# Altium PCB UPCNSL-ABS-PVC-DEP-1A.PcbDoc
Units mm, origin at the board's own origin, x right, y up, seen from the top; angles counter-clockwise.
Board outline 82 x 98.4 mm, 2 copper layers (Top Layer, Bottom Layer), stack 0.325 mm thick; 58 components, 56 nets, 158 pads, 50 vias.
Unrouted connection lines stored in the file: 9.
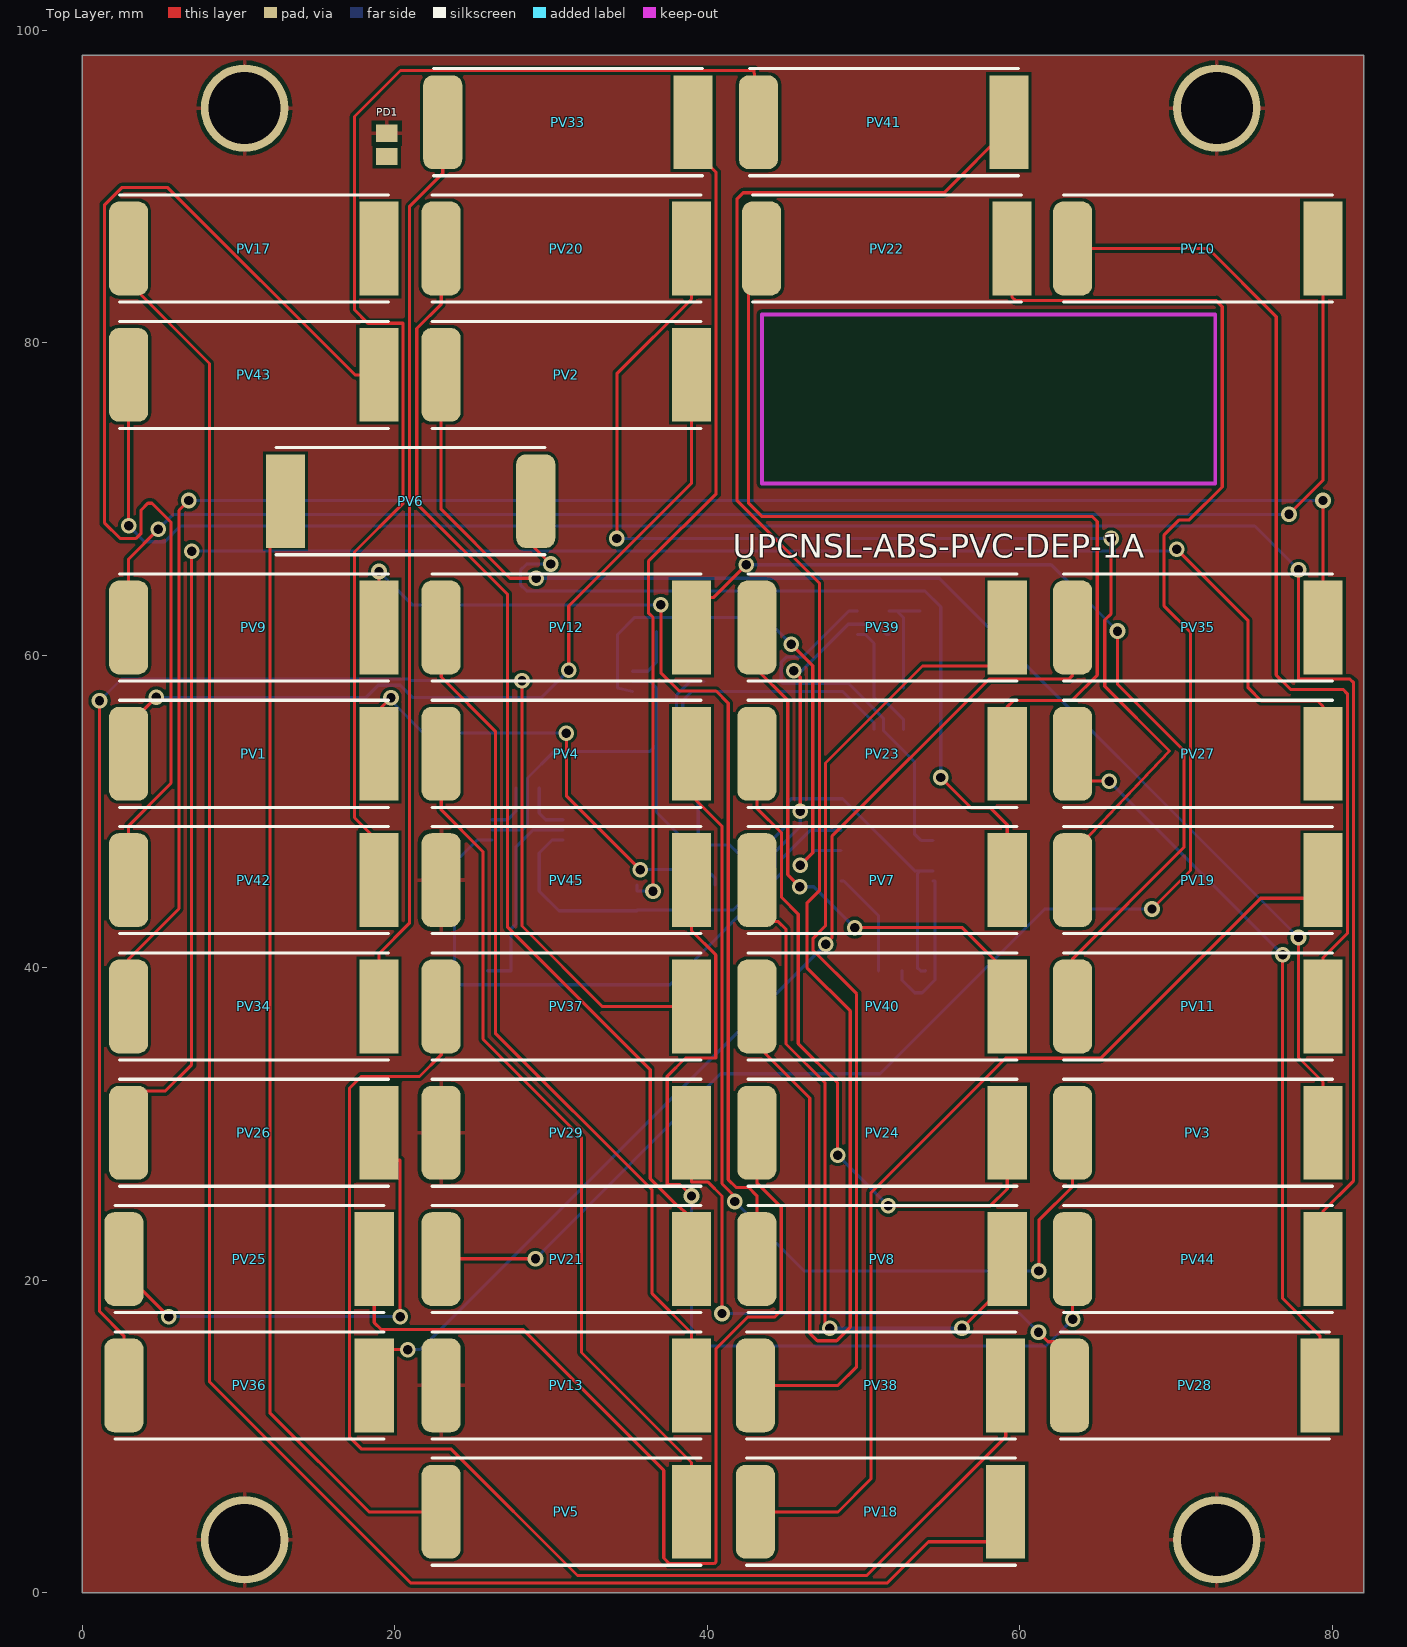
[diagram p0: Top Layer view]
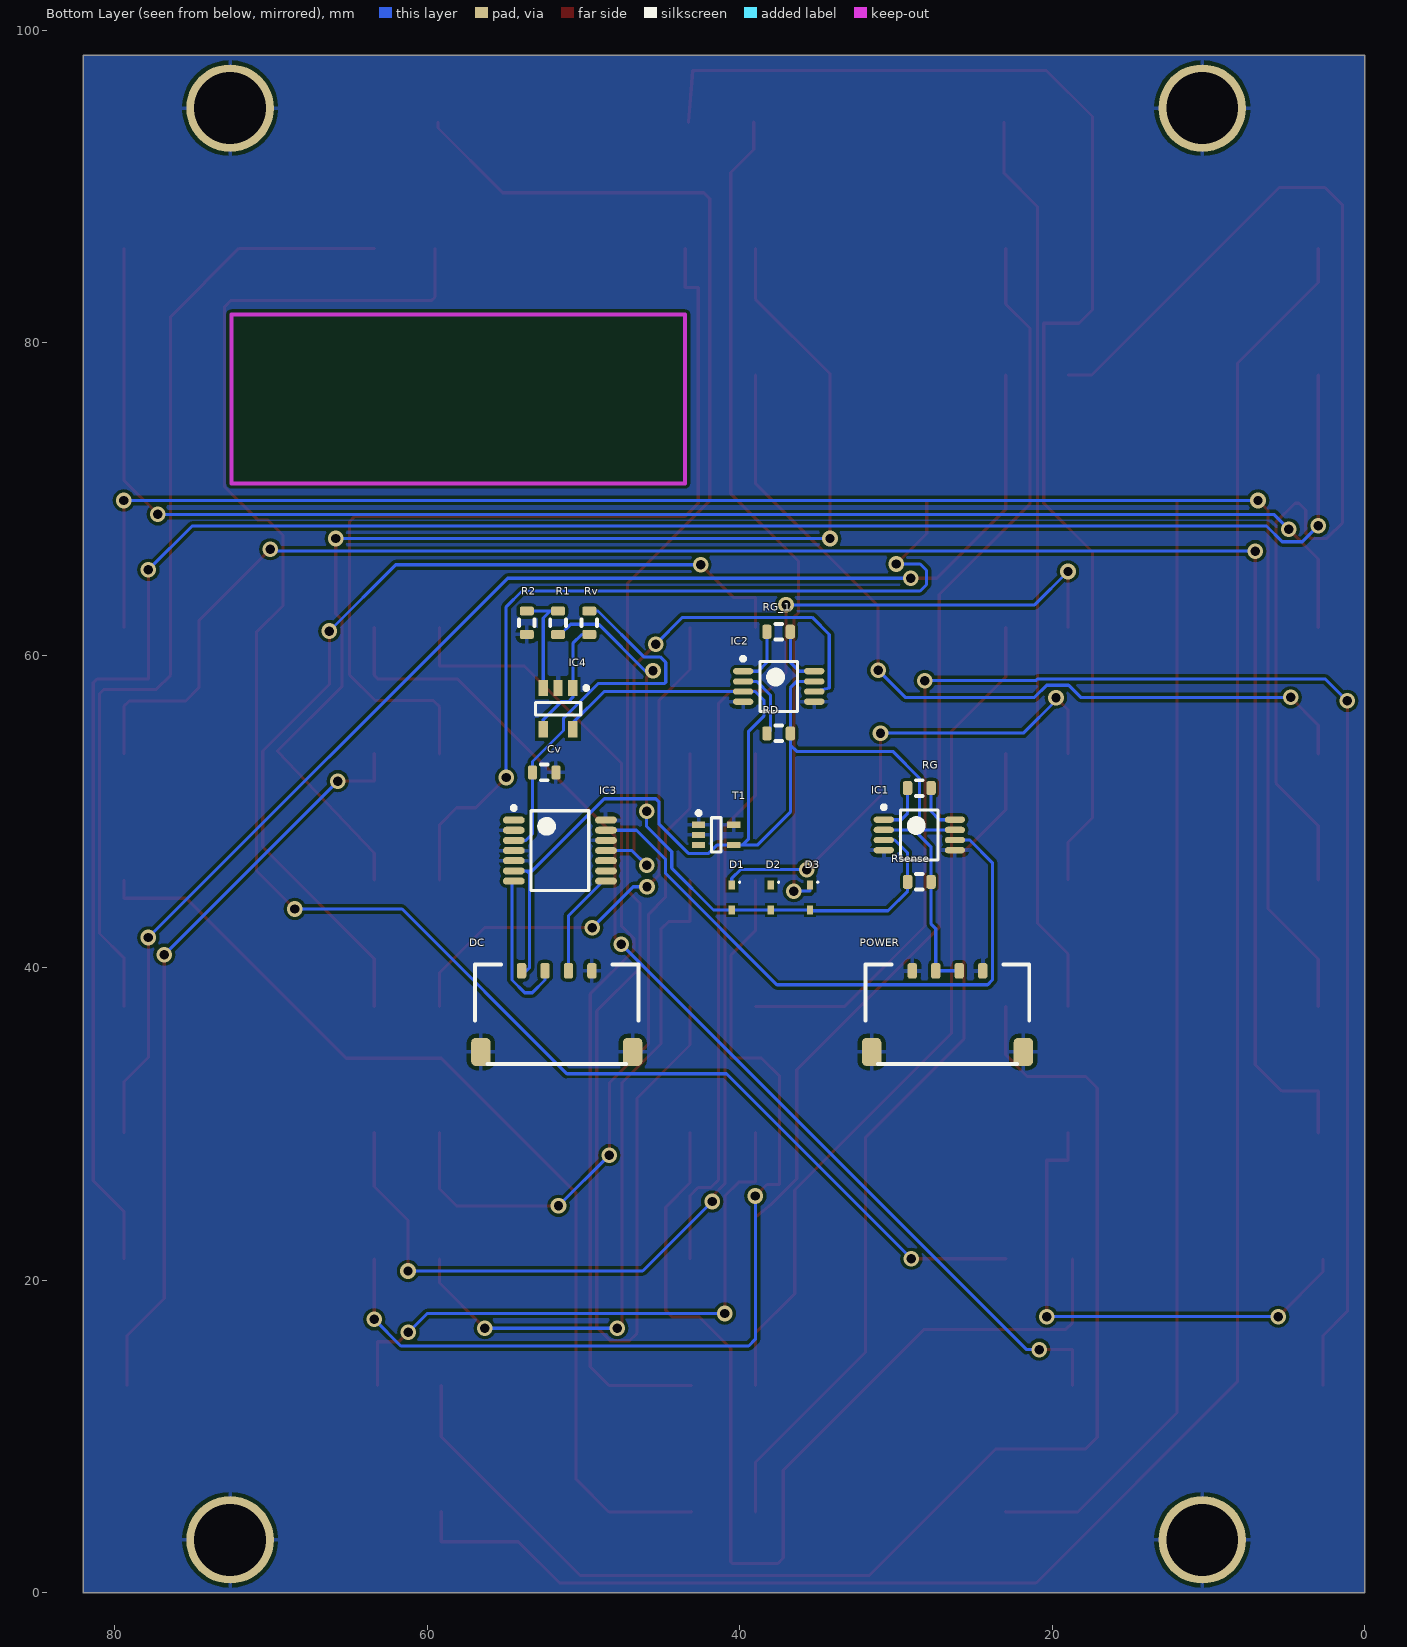
[diagram p1: Bottom Layer view, seen from below]
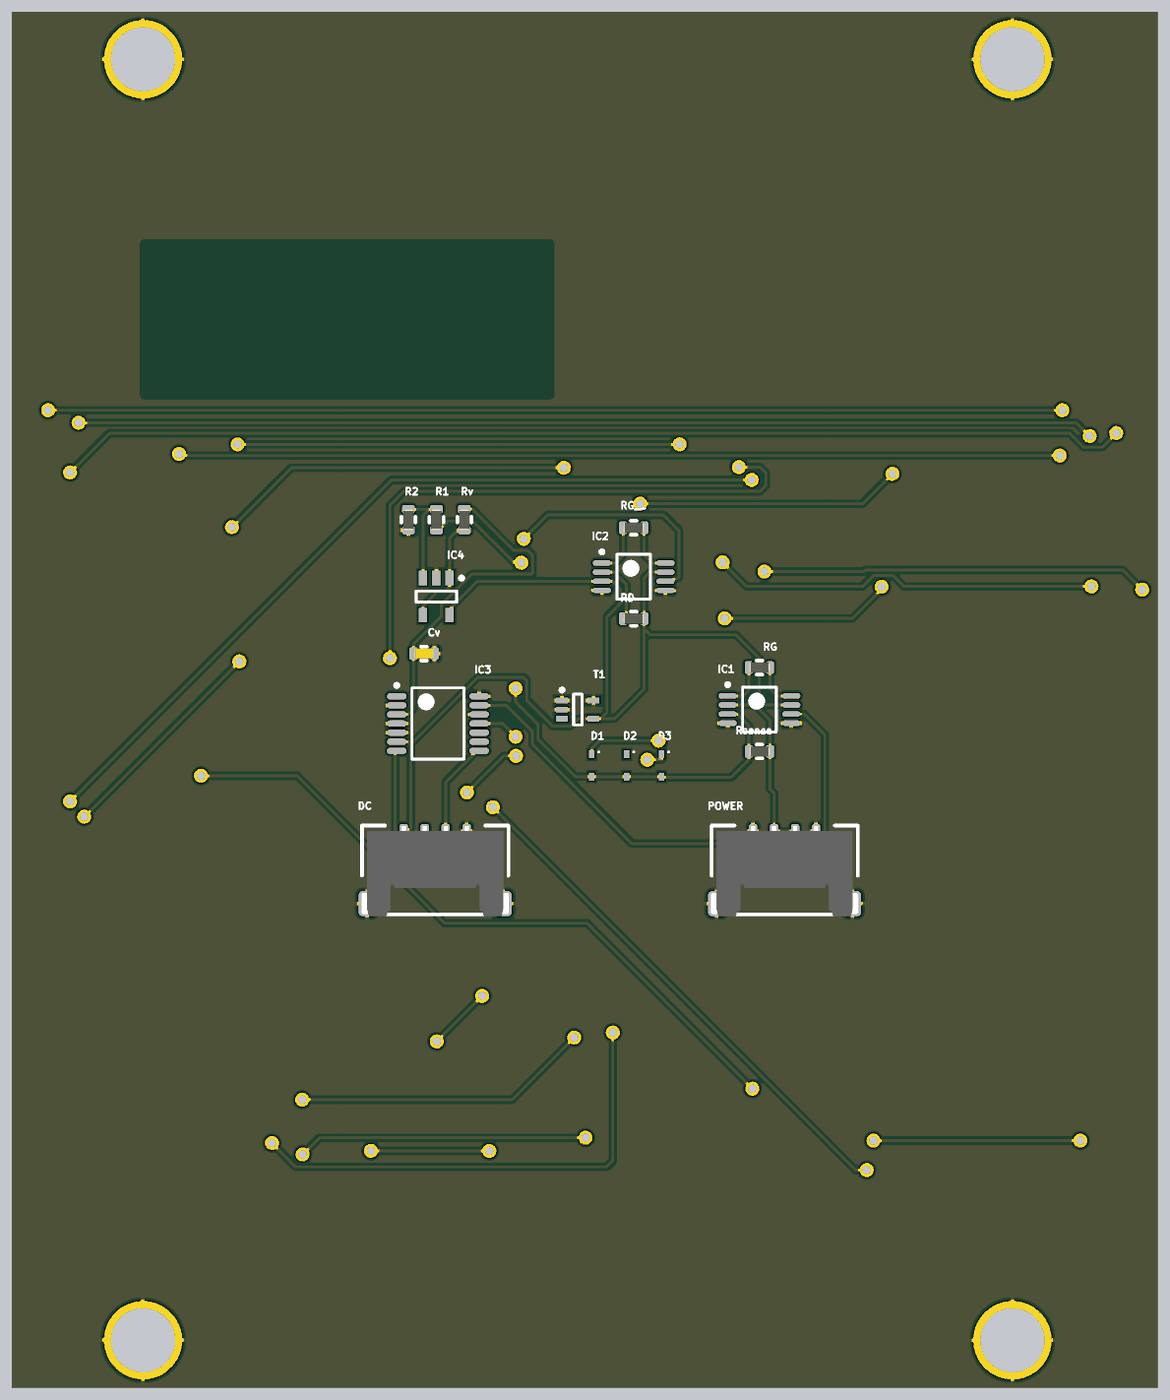
[diagram p2: 3D render of the assembled board from below, using the file's embedded part models]

## Layer stack, top to bottom
Top Solder: solder mask 0.0102, Solder Resist, Dk 3.5
Top Layer: signal copper 0.0356
Dielectric 1: core 0.254, FR-4, Dk 4.2
Bottom Layer: signal copper 0.0356
Bottom Solder: solder mask 0.0102, Solder Resist, Dk 3.5

## Board outline
0,0 82,0 82,98.4 0,98.4

## Design rules (kind name [scope] priority, off if disabled: settings)
Clearance [All] p1: gap=0.2
PolygonConnect [All] p1: connectstyle=Relief reliefconductorwidth=0.256 reliefentries=4 polygonreliefangle="90 Angle" airgapwidth=0.256
RoutingVias [All] p1: holewidth=0.6 width=1 viastyle="Through Hole" minholewidth=0.711 minwidth=1.27 maxholewidth=0.711 maxwidth=1.27
SolderMaskExpansion [All] p1: expansion=0.102
UnpouredPolygon [All] p1: allowunpoured=FALSE
Width [All] p1: maxlimit=1 minlimit=0.2 preferedwidth=0.2
29 further rules are at their usual default settings.

## Components (designator, comment, footprint, x,y, rotation, side; value= is the part's Value field where it differs from the comment)
Cv "CAP0603" CAP0603 52.5,52.5 r0 bottom
D1 "DIODE" "(Schottky diode) SODFL160X70-2N" 40.5,44.5 r270 bottom
D2 "DIODE" "(Schottky diode) SODFL160X70-2N" 38,44.5 r270 bottom
D3 "DIODE" "(Schottky diode) SODFL160X70-2N" 35.5,44.5 r270 bottom
DC "5040500491" 5040500491 51.7,34.619 r180 bottom
IC1 "AD623ARMZ" AD623ARMZ 28.5,48.5 r180 bottom
IC2 "AD623ARMZ" AD623ARMZ 37.5,58 r180 bottom
IC3 "MCP3424" MCP3424 51.5,47.5 r180 bottom
IC4 "AD8603" AD8603 51.616,56.577 r270 bottom
PD1 "Photo Sen" C0805 19.493,92.65 r270 top
POWER "5040500491" 5040500491 26.7,34.619 r180 bottom
PV1 "PVCELL" "PV CELLS" 11,53.691 r180 top
PV2 "PVCELL" "PV CELLS" 31,77.936 r180 top
PV3 "PVCELL" "PV CELLS" 71.4,29.445 r180 top
PV4 "PVCELL" "PV CELLS" 31,53.691 r180 top
PV5 "PVCELL" "PV CELLS" 31,5.2 r180 top
PV6 "PVCELL" "PV CELLS" 21,69.855 r0 top
PV7 "PVCELL" "PV CELLS" 51.2,45.609 r180 top
PV8 "PVCELL" "PV CELLS" 51.2,21.364 r180 top
PV9 "PVCELL" "PV CELLS" 11,61.773 r180 top
PV10 "PVCELL" "PV CELLS" 71.4,86.018 r180 top
PV11 "PVCELL" "PV CELLS" 71.4,37.527 r180 top
PV12 "PVCELL" "PV CELLS" 31,61.773 r180 top
PV13 "PVCELL" "PV CELLS" 31,13.282 r180 top
PV17 "PVCELL" "PV CELLS" 11,86.018 r180 top
PV18 "PVCELL" "PV CELLS" 51.1,5.2 r180 top
PV19 "PVCELL" "PV CELLS" 71.4,45.609 r180 top
PV20 "PVCELL" "PV CELLS" 31,86.018 r180 top
PV21 "PVCELL" "PV CELLS" 31,21.364 r180 top
PV22 "PVCELL" "PV CELLS" 51.5,86.018 r180 top
PV23 "PVCELL" "PV CELLS" 51.2,53.691 r180 top
PV24 "PVCELL" "PV CELLS" 51.2,29.445 r180 top
PV25 "PVCELL" "PV CELLS" 10.7,21.364 r180 top
PV26 "PVCELL" "PV CELLS" 11,29.445 r180 top
PV27 "PVCELL" "PV CELLS" 71.4,53.691 r180 top
PV28 "PVCELL" "PV CELLS" 71.2,13.282 r180 top
PV29 "PVCELL" "PV CELLS" 31,29.445 r180 top
PV33 "PVCELL" "PV CELLS" 31.1,94.1 r180 top
PV34 "PVCELL" "PV CELLS" 11,37.527 r180 top
PV35 "PVCELL" "PV CELLS" 71.4,61.773 r180 top
PV36 "PVCELL" "PV CELLS" 10.7,13.282 r180 top
PV37 "PVCELL" "PV CELLS" 31,37.527 r180 top
PV38 "PVCELL" "PV CELLS" 51.1,13.282 r180 top
PV39 "PVCELL" "PV CELLS" 51.2,61.773 r180 top
PV40 "PVCELL" "PV CELLS" 51.2,37.527 r180 top
PV41 "PVCELL" "PV CELLS" 51.3,94.1 r180 top
PV42 "PVCELL" "PV CELLS" 11,45.609 r180 top
PV43 "PVCELL" "PV CELLS" 11,77.936 r180 top
PV44 "PVCELL" "PV CELLS" 71.4,21.364 r180 top
PV45 "PVCELL" "PV CELLS" 31,45.609 r180 top
R1 "RES0603" RES0603 51.616,62.077 r270 bottom
R2 "RES0603" RES0603 53.616,62.077 r90 bottom
RD "RES0603" RES0603 37.5,55 r180 bottom
RG "RES0603" RES0603 28.5,51.5 r180 bottom
RG_1 "RES0603" RES0603 37.5,61.5 r180 bottom
Rsense "RES0603" RES0603 28.5,45.5 r0 bottom
Rv "RES0603" RES0603 49.616,62.077 r90 bottom
T1 "LMT84 DCK" DCK/SOT65P210X110-5N 41.5,48.5 r180 bottom

## Footprints (in the part's own frame and the unit in brackets; to place one, negate y for a bottom-side part, rotate by r counter-clockwise, add the part's x,y. Pads: shape width x height; smd on the part's side, far side on the other; paste and mask are expansions set on the pad)
5040500491 [mm] "1.50mm Pitch Pico-Lock™ Surface Mount Wire-to-Board Header, Right Angle,2.00mm Mated Height, Positive Side Locks, 4 Circuits"
  rrect50% 1.25x1.8 smd: 0(-4.855,0) 0(4.855,0)
  rrect50% 0.6x1 smd: 1(-2.25,5.19) 2(-0.75,5.19) 3(0.75,5.19) 4(2.25,5.19)
  silkscreen extent -5.23,-0.76 5.23,5.59, body extent -5.27,-0.9 5.28,5.54, height 1.98
"(Schottky diode) SODFL160X70-2N" [mm] "SODFL, 2-Leads, Body 0,80x1,60mm, IPC Medium Density"
  rect 0.55x0.4 smd: A(-0.8,0) K(0.8,0)
  silkscreen extent -1.02,0.45 -0.93,0.55, body extent -0.65,-0.45 0.65,0.45, height 0.7
AD623ARMZ [mm] "Single-Supply, Rail-to-Rail, Instrumentation Amplifier"
  oval 1.3x0.4 smd: 1(-2.275,0.975) 2(-2.275,0.325) 3(-2.275,-0.325) 4(-2.275,-0.975) 5(2.275,-0.975) 6(2.275,-0.325) 7(2.275,0.325) 8(2.275,0.975)
  silkscreen extent -2.4,-1.6 1.2,1.9, body extent -1.6,-1.6 1.6,1.6, height 1.1
AD8603 [mm] "SOT23, 5-Leads, Body 2,90x2,80mm, Pitch 0,95mm, IPC Medium Density"
  rect 1.05x0.6 smd: 1(-1.325,0.95) 2(-1.325,0) 3(-1.325,-0.95) 4(1.325,-0.95) 5(1.325,0.95)
  silkscreen extent -1.45,-1.45 0.4,1.92, body extent -0.8,-1.45 0.8,1.45, height 1
C0805 [mm] "Chip Capacitor, Body 2.0x1.3mm, IPC High Density"
  rect 1.1x1.4 smd: 1(-0.75,0) 2(0.75,0)
  body extent -1.1,-0.72 1.1,0.72, height 1.4
CAP0603 [mm] "Capacitor Chip Inductor, Body 0.6x0.3mm, IPC High Density"
  rrect50% 0.6x0.9 smd: 1(-0.75,0) 2(0.75,0)
  silkscreen extent -0.2,-0.5 0.2,0.5, body extent -0.76,-0.38 0.76,0.38, height 0.76
DCK/SOT65P210X110-5N [mm] "SOT23, 5-Leads, Body 2,00x2,10mm, Pitch 0,65mm, IPC Medium Density"
  rect 0.85x0.4 smd: 1(-1.125,0.65) 2(-1.125,0) 3(-1.125,-0.65) 4(1.125,-0.65) 5(1.125,0.65)
  silkscreen extent -1.25,-1.1 0.3,1.52, body extent -0.7,-1.07 0.7,1.08, height 1.1
MCP3424 [mm] "18-Bit, Multi-Channel ?S Analog-to-Digital Converter with  I2C"
  oval 1.4x0.45 smd: 1(-2.95,1.95) 2(-2.95,1.3) 3(-2.95,0.65) 4(-2.95,0) 5(-2.95,-0.65) 6(-2.95,-1.3) 7(-2.95,-1.95) 8(2.95,-1.95) 9(2.95,-1.3) 10(2.95,-0.65) 11(2.95,0) 12(2.95,0.65) 13(2.95,1.3) 14(2.95,1.95)
  silkscreen extent -3.08,-2.55 1.85,2.85, body extent -2.25,-2.55 2.25,2.55, height 1.2
"PV CELLS" [mm] "IXYS KXOB22-12X1L-ND"
  rect 2.5x6 smd: 1(-7.993,0)
  rrect50% 2.5x6 smd: 2(8.025,0)
  silkscreen extent -8.6,-3.42 8.6,3.43, body extent -8.97,-3.5 9.03,3.5, height 1.8
RES0603 [mm] "Resistor Chip Inductor, Body 0.6x0.3mm, IPC High Density"
  rrect50% 0.6x0.9 smd: 1(-0.75,0) 2(0.75,0)
  silkscreen extent -0.2,-0.5 0.2,0.5, body extent -0.76,-0.38 0.76,0.38, height 0.76

## Part data
Cv: "Capacitor"
DC POWER: library part MOLEX_5040500491, "1.50mm Pitch Pico-Lock™ Surface Mount Wire-to-Board Header, Right Angle,2.00mm Mated Height, Positive Side Locks, 4 Circuits"
IC3: "18-Bit, Multi-Channel ?S Analog-to-Digital Converter with  I2C"
PD1: "Photosensitive Diode"
PV1 PV2 PV3 PV4 PV5 PV6 PV7 PV8 PV9 PV10 PV11 PV12 PV13 PV17 PV18 PV19 PV20 PV21 PV22 PV23 PV24 PV25 PV26 PV27 PV28 PV29 PV33 PV34 PV35 PV36 PV37 PV38 PV39 PV40 PV41 PV42 PV43 PV44 PV45: library part PVCELLS, "IXYS KXOB22-12X1L-ND"
R1 R2 RD RG RG_1 Rsense Rv: "Resistor"

## Free pads (board coordinates)
  round 5.6 hole 4.6: 0(10.4,95) 1(72.6,95) 2(72.6,3.4) 3(10.4,3.4)

## Via types
v1: diameter 1, hole 0.6, Top Layer to Bottom Layer, 50 vias

## Nets (pads, with @x,y where several pads share a name; then routed paths per layer and width w, separated by ;. In a path a pad name is that pad's centre, name@x,y a point inside that pad or via, vN(x,y) a via of type N, cw(c..) or ccw(c..) an arc to the next point about the centre after c; other vN are vias at no path point)
5V: DC.1 IC1.7 IC2.3 IC2.7 IC3.6 IC4.5 RD.2 T1.4 | length 77.6
  Bottom Layer w0.2: IC1.7 28.175,48.825 28.499,49.149 28.499,52.146 30.201,53.848 36.344,53.848 36.75,54.254 ; IC2.7 36.337,58.325 36.75,57.912 RD.2 36.75,54.254 ; IC4.5 50.666,55.677 48.668,57.675 IC2.3 39.006,57.675 38.43,57.099 38.43,56.134 39.421,55.143 39.421,48.256 39.827,47.85 ; DC.1 53.95,39.802 53.645,39.802 53.442,40.005 53.442,45.997 53.645,46.2 ; IC3.6 53.645,46.2 ; 36.75,54.254 36.75,49.962 38.862,47.85 39.827,47.85 ; 39.827,47.85 T1.4 41.453,47.85 41.983,47.32 43.282,47.32 45.149,49.187 45.149,50.597 45.364,50.813 48.654,50.813 53.266,46.2 53.645,46.2
GND: Cv.1 DC.0 DC.4 IC1.4 IC1.5 IC2.4 IC2.5 IC3.2 IC3.4 IC3.5 IC3.12 IC3.14 IC4.2 pad.0 pad.1 pad.2 pad.3 PD1.1 POWER.0 POWER.1 POWER.4 PV13.2 PV29.2 PV45.2 R2.1 T1.1 T1.2 T1.5
IRR: IC2.6 IC3.11 | length 34.7
  Top Layer w0.2: v1(45.364,60.706) 46.749,59.322 46.749,47.355 v1(45.949,46.555)
  Bottom Layer w0.2: IC2.6 34.265,57.912 34.265,61.328 35.357,62.421 43.65,62.421 v1(45.364,60.706) ; v1(45.949,46.555) 46.894,47.5 IC3.11
ISENSE: IC1.6 IC3.13 | length 40
  Bottom Layer w0.2: IC1.6 25.273,48.175 23.825,46.727 23.825,39.218 24.13,38.913 37.617,38.913 44.742,46.038 44.742,46.948 46.594,48.8 IC3.13
NetIC1_1: IC1.1 RG.1 | length 3.3
  Bottom Layer w0.2: RG.1 29.25,49.892 29.667,49.475 IC1.1
NetIC1_8: IC1.8 RG.2 | length 3.2
  Bottom Layer w0.2: IC1.8 27.229,49.475 27.75,49.996 RG.2
NetIC2_1: IC2.1 RG_1.1 | length 3.7
  Bottom Layer w0.2: RG_1.1 38.25,59.538 38.813,58.975 IC2.1
NetIC2_2: IC2.2 PD1.2 RD.1 | length 4.8
  Bottom Layer w0.2: RD.1 38.25,55.143 38.024,55.143 38.024,57.436 38.913,58.325 IC2.2
NetIC2_8: IC2.8 RG_1.2 | length 3.7
  Bottom Layer w0.2: IC2.8 36.187,58.975 36.75,59.538 RG_1.2
NetPV1_2: PV1.2 PV2.1 | length 54.3
  Top Layer w0.2: PV1.2 2.975,55.528 v1(4.75,57.302) ; v1(31.14,59.03) 31.14,63.144 38.993,70.997 PV2.1
  Bottom Layer w0.2: v1(4.75,57.302) 18.174,57.302 18.949,58.077 20.358,58.077 21.133,57.302 29.413,57.302 v1(31.14,59.03)
NetPV2_2: PV2.2 PV3.1 | length 87.9
  Top Layer w0.2: PV2.2 22.975,69.328 27.381,64.922 v1(29.058,64.922) ; v1(77.826,41.935) 77.826,34.257 79.393,32.69 PV3.1
  Bottom Layer w0.2: v1(29.058,64.922) 54.839,64.922 v1(77.826,41.935)
NetPV3_2: PV3.2 PV4.1 | length 60.8
  Top Layer w0.2: PV4.1 38.993,51.003 40.943,49.053 40.943,26.189 41.732,25.4 41.732,25.07 v1(41.758,25.044) ; v1(61.214,20.599) 61.214,23.848 63.375,26.01 PV3.2
  Bottom Layer w0.2: v1(41.758,25.044) 46.203,20.599 v1(61.214,20.599)
NetPV4_2: PV4.2 PV5.1 | length 55.1
  Top Layer w0.2: PV4.2 22.975,50.101 25.654,47.422 25.654,35.433 31.952,29.135 31.952,15.388 38.993,8.347 PV5.1
NetPV5_2: PV5.2 PV6.1 | length 71.9
  Top Layer w0.2: PV6.1@12.007,69.855 12.007,68.097 12.014,68.09 12.014,11.532 18.364,5.182 22.975,5.182 PV5.2
NetPV6_2: PV6.2 PV7.1 | length 55.3
  Top Layer w0.2: PV6.2@28.025,69.855 28.025,67.787 v1(29.975,65.837) ; v1(54.94,52.172) 56.871,50.241 58.115,50.241 59.193,49.163 PV7.1
  Bottom Layer w0.2: v1(29.975,65.837) 28.448,65.837 28.042,65.43 28.042,64.516 28.448,64.11 53.924,64.11 54.94,63.094 v1(54.94,52.172)
NetPV7_2: PV7.2 PV8.1 | length 45.5
  Top Layer w0.2: PV7.2 43.175,42.951 44.552,42.951 45.034,42.469 45.034,35.128 47.536,32.626 47.536,17.234 v1(47.828,16.942) ; v1(56.298,16.942) 59.193,19.837 PV8.1
  Bottom Layer w0.2: v1(47.828,16.942) v1(56.298,16.942)
NetPV9_2: PV9.2 PV10.1 | length 97.7
  Top Layer w0.2: PV9.2 2.975,66.158 v1(4.877,68.059) ; v1(77.216,69.012) 79.393,71.189 PV10.1
  Bottom Layer w0.2: v1(4.877,68.059) 5.829,69.012 v1(77.216,69.012)
NetPV10_2: PV10.2 PV11.1 | length 63.5
  Top Layer w0.2: PV10.2 63.375,86.03 72.034,86.03 76.403,81.661 76.403,58.725 77.318,57.81 80.67,57.81 80.95,57.531 80.95,42.197 79.393,40.64 PV11.1
NetPV11_2: PV11.2 PV12.1 | length 60.5
  Top Layer w0.2: PV12.1 38.993,63.703 40.411,63.703 v1(42.494,65.786) ; PV11.2 63.375,40.589 70.51,47.724 70.51,53.873 66.243,58.141 v1(66.243,61.544)
  Bottom Layer w0.2: v1(42.494,65.786) 62.001,65.786 v1(66.243,61.544)
NetPV12_2: PV12.2 PV13.1 | length 55.1
  Top Layer w0.2: PV12.2 22.975,58.61 26.441,55.143 26.441,35.814 36.474,25.781 36.474,19.156 38.993,16.637 PV13.1
NetPV17_2: PV17.2 PV18.1 | length 133.9
  Top Layer w0.2: PV17.2 2.975,83.842 8.153,78.664 8.153,13.513 21.031,0.635 51.511,0.635 54.153,3.277 59.093,3.277 PV18.1
NetPV18_2: PV18.2 PV19.1 | length 64.5
  Top Layer w0.2: PV18.2 43.075,5.182 48.362,5.182 50.478,7.298 50.478,25.612 59.08,34.214 65.176,34.214 75.413,44.45 79.393,44.45 PV19.1
NetPV19_2: PV19.2 PV20.1 | length 78.4
  Top Layer w0.2: v1(34.214,67.462) 34.214,78.003 38.993,82.783 PV20.1 ; PV19.2 63.375,47.346 69.571,53.873 65.43,58.014 65.43,62.255 65.837,62.662 v1(65.837,67.462)
  Bottom Layer w0.2: v1(34.214,67.462) v1(65.837,67.462)
NetPV20_2: PV20.2 PV21.1 | length 72.6
  Top Layer w0.2: PV20.2 22.975,82.462 21.412,80.899 21.412,69.698 27.229,63.881 27.229,42.596 36.347,33.477 36.347,26.51 37.947,24.911 38.993,24.054 PV21.1
NetPV21_2: PV21.2 PV22.1 | length 113.8
  Top Layer w0.2: PV21.2 22.975,21.387 v1(29.007,21.387) ; PV22.1 59.493,82.906 59.696,82.702 72.542,82.702 72.949,82.296 72.949,70.764 70.841,68.656 70.206,68.656 69.215,67.666 69.215,63.17 70.917,61.468 70.917,46.228 v1(68.453,43.764)
  Bottom Layer w0.2: v1(29.007,21.387) 40.843,33.223 51.054,33.223 61.595,43.764 v1(68.453,43.764)
NetPV22_2: PV22.2 PV23.1 | length 59.3
  Top Layer w0.2: PV22.2 43.475,83.515 42.647,83.515 42.647,69.723 43.485,68.885 64.618,68.885 64.948,68.555 64.948,58.725 63.322,57.099 59.6,57.099 59.193,56.693 PV23.1
NetPV23_2: PV23.2 PV24.1 | length 44.1
  Top Layer w0.2: PV23.2 43.175,50.216 44.749,48.642 44.749,44.507 45.822,43.434 45.822,35.147 48.336,32.633 v1(48.336,28.016) ; v1(51.587,24.765) 58.115,24.765 59.193,25.843 PV24.1
  Bottom Layer w0.2: v1(48.336,28.016) v1(51.587,24.765)
NetPV25_2: PV25.2 PV26.1 | length 32.8
  Top Layer w0.2: PV25.2 2.675,20.549 v1(5.545,17.678) ; PV26.1 18.993,27.686 20.345,27.686 v1(20.345,17.678)
  Bottom Layer w0.2: v1(5.545,17.678) v1(20.345,17.678)
NetPV26_2: PV26.2 PV27.1 | length 122.4
  Top Layer w0.2: PV26.2 2.975,32.106 5.309,32.106 7.01,33.807 v1(7.01,66.66) ; v1(70.028,66.777) 74.6,62.205 74.6,57.912 75.438,57.074 79.045,57.074 79.393,56.725 PV27.1
  Bottom Layer w0.2: v1(7.01,66.66) 69.912,66.66 v1(70.028,66.777)
NetPV27_2: PV27.2 PV28.1 | length 48.3
  Top Layer w0.2: PV27.2 63.375,51.943 v1(65.71,51.943) ; v1(76.81,40.843) 76.81,18.843 79.193,16.459 PV28.1
  Bottom Layer w0.2: v1(65.71,51.943) v1(76.81,40.843)
NetPV28_2: PV28.2 PV29.1 | length 38.8
  Top Layer w0.2: PV29.1 38.993,26.289 40.056,26.289 40.945,25.4 v1(40.945,17.882) ; v1(61.189,16.688) 61.798,16.078 63.175,16.078 PV28.2
  Bottom Layer w0.2: v1(40.945,17.882) 59.995,17.882 v1(61.189,16.688)
NetPV33_2: PV33.2 PV34.1 | length 58.3
  Top Layer w0.2: PV34.1 18.993,40.894 20.943,42.844 20.943,88.698 23.075,90.83 PV33.2
NetPV34_2: PV34.2 PV35.1 | length 114.7
  Top Layer w0.2: PV34.2 2.975,40.56 6.198,43.783 6.198,69.266 v1(6.833,69.901) ; PV35.1 v1(79.393,69.901)
  Bottom Layer w0.2: v1(6.833,69.901) v1(79.393,69.901)
NetPV35_2: PV35.2 PV36.1 | length 71.7
  Top Layer w0.2: PV36.1 18.693,15.57 v1(20.828,15.57) ; v1(47.574,41.515) 47.968,41.908 47.968,48.411 58.028,58.471 63.121,58.471 63.375,58.725 PV35.2
  Bottom Layer w0.2: v1(20.828,15.57) 21.63,15.57 v1(47.574,41.515)
NetPV36_2: PV36.2 PV37.1 | length 100.8
  Top Layer w0.2: v1(1.118,57.074) 1.118,18.017 2.675,16.459 PV36.2 ; v1(28.143,58.369) 28.143,42.672 33.299,37.516 38.993,37.516 PV37.1
  Bottom Layer w0.2: v1(1.118,57.074) 2.521,58.477 20.949,58.477 21.056,58.369 v1(28.143,58.369)
NetPV37_2: PV37.2 PV38.1 | length 84.8
  Top Layer w0.2: PV37.2 22.975,34.431 21.59,33.045 17.856,33.045 17.12,32.309 17.12,9.957 17.856,9.22 23.597,9.22 31.699,1.118 50.203,1.118 59.093,10.008 PV38.1
NetPV38_2: PV38.2 PV39.1 | length 63.7
  Top Layer w0.2: PV38.2 43.075,13.284 48.362,13.284 49.555,14.478 49.555,38.329 46.774,41.11 46.774,41.897 47.568,42.691 47.568,53.105 53.772,59.309 59.193,59.309 PV39.1
NetPV39_2: PV39.2 PV40.1 | length 35.4
  Top Layer w0.2: PV39.2 43.175,59.085 45.149,57.112 45.149,45.961 v1(45.923,45.187) ; v1(49.428,42.57) 56.323,42.57 59.193,39.7 PV40.1
  Bottom Layer w0.2: v1(45.923,45.187) 46.812,45.187 v1(49.428,42.57)
NetPV41_2: PV41.2 PV42.1 | length 83.5
  Top Layer w0.2: PV42.1 18.993,48.037 17.424,49.606 17.424,66.599 20.543,69.717 20.543,81.236 18.288,81.236 17.424,82.1 17.424,94.463 20.371,97.409 42.996,97.409 PV41.2
NetPV42_2: PV42.2 PV43.1 | length 74.3
  Top Layer w0.2: PV42.2 2.975,49.098 5.69,51.813 5.69,68.504 4.47,69.723 4.207,69.723 3.775,69.291 3.775,67.796 3.454,67.475 2.426,67.475 1.422,68.478 1.422,88.798 2.54,89.916 5.486,89.916 17.475,77.927 18.993,77.927 PV43.1
NetPV43_2: PV43.2 PV44.1 | length 134.8
  Top Layer w0.2: v1(2.975,68.275) PV43.2 ; v1(77.826,65.456) 77.826,58.471 81.126,58.471 81.356,58.24 81.356,26.383 79.393,24.42 PV44.1
  Bottom Layer w0.2: v1(2.975,68.275) 3.991,67.259 5.283,67.259 6.286,68.262 75.019,68.262 v1(77.826,65.456)
NetPV44_2: PV44.2 PV45.1 | length 62.7
  Top Layer w0.2: v1(38.989,25.4) 38.252,26.137 37.44,26.137 37.44,33.059 38.608,34.227 40.543,34.227 40.543,40.827 38.993,42.377 PV45.1 ; v1(63.375,17.503) PV44.2
  Bottom Layer w0.2: v1(38.989,25.4) 38.989,16.231 39.421,15.799 61.671,15.799 v1(63.375,17.503)
PV9: PV8.2 PV9.1 | length 68.8
  Top Layer w0.2: PV9.1 v1(18.993,65.354) ; v1(37.033,63.221) 37.033,58.877 38.202,57.709 40.564,57.709 41.343,56.929 41.343,26.445 41.834,25.954 42.635,25.954 43.175,25.414 PV8.2
  Bottom Layer w0.2: v1(18.993,65.354) 21.127,63.221 v1(37.033,63.221)
PV25: PV24.2 PV25.1 | length 66.5
  Top Layer w0.2: PV25.1 18.693,17.299 19.126,16.866 28.194,16.866 37.211,7.849 37.211,2.235 37.567,1.88 40.437,1.88 40.564,2.007 40.564,15.646 42.57,17.653 44.298,17.653 44.729,18.085 44.729,24.684 43.175,26.238 PV24.2
PV41: PV40.2 PV41.1 | length 120.9
  Top Layer w0.2: PV40.2 43.175,35.057 46.558,31.674 46.558,16.624 47.041,16.142 48.273,16.142 49.143,17.012 49.143,37.242 46.374,40.011 46.374,44.139 47.168,44.933 47.168,64.618 41.91,69.875 41.91,89.205 42.291,89.586 55.153,89.586 59.293,93.726 PV41.1
SCL: DC.3 IC3.8 | length 6.8
  Bottom Layer w0.2: IC3.8 48.727,45.55 50.95,43.327 DC.3
SDA: DC.2 IC3.7 | length 9.8
  Bottom Layer w0.2: DC.2 52.45,39.218 53.263,38.405 53.746,38.405 54.559,39.218 54.559,45.55 IC3.7
TEMP: IC3.1
VCC: D1.K D2.K D3.K IC1.3 R1.2 Rsense.2 | length 42.1
  Top Layer w0.2: v1(45.542,59.004) 45.949,58.598 v1(45.949,50.013)
  Bottom Layer w0.2: IC1.3 30.079,48.175 29.25,47.346 Rsense.2 29.25,44.907 30.508,43.649 35.5,43.649 D3.K 36.728,43.7 D2.K 39.243,43.7 D1.K 41.668,43.7 44.342,46.374 44.342,47.429 45.949,49.036 v1(45.949,50.013) ; v1(45.542,59.004) 46.05,59.004 49.022,61.976 50.811,61.976 51.46,61.327 R1.2
VCC_1: D1.A PV1.1 | length 32.3
  Top Layer w0.2: PV1.1 18.993,56.509 v1(19.761,57.277) ; v1(30.988,55.016) 30.988,51.003 v1(35.712,46.279)
  Bottom Layer w0.2: v1(19.761,57.277) 19.761,57.099 21.844,55.016 v1(30.988,55.016) ; v1(35.712,46.279) 39.941,46.279 40.5,45.72 D1.A
VCC_2: D2.A PV17.1
VCC_3: D3.A PV33.1 | length 53.1
  Top Layer w0.2: v1(36.525,44.907) 36.525,62.421 36.233,62.713 36.233,66.002 40.564,70.333 40.564,90.881 39.093,92.352 PV33.1
  Bottom Layer w0.2: D3.A 35.5,44.907 v1(36.525,44.907)
VD: IC4.1 IC4.4 Rv.1 | length 7.9
  Bottom Layer w0.2: Rv.1 50.096,61.327 50.666,60.757 IC4.1 50.666,57.302 50.938,57.03 51.415,57.03 52.566,55.88 IC4.4
VDD: IC1.2 POWER.2 POWER.3 Rsense.1 | length 13
  Bottom Layer w0.2: POWER.3 POWER.2 27.45,42.494 27.75,42.794 Rsense.1 27.75,47.721 28.854,48.825 IC1.2
VDIV: IC4.3 R1.1 R2.2 | length 7.1
  Bottom Layer w0.2: R1.1 52.121,62.827 ; IC4.3 52.566,62.382 52.121,62.827 ; R2.2 52.121,62.827
VOLT: Cv.2 IC3.3 Rv.2 | length 24.6
  Bottom Layer w0.2: Rv.2 49.06,62.827 46.126,59.893 45.085,59.893 44.729,59.538 44.729,58.262 44.8,58.191 49.047,58.191 51.266,55.973 51.266,55.186 53.25,53.201 Cv.2 53.25,48.565 53.665,48.15 IC3.3
pads on no net: IC3.9 IC3.10 T1.3

## Polygon pours and split planes (outlines as drawn)
GND on Top Layer "Top" (solid, pour order 4): 0,0 82,0 82,98.4 0,98.4
GND on Bottom Layer "Bot" (solid, pour order 6): 0,0 82,0 82,98.4 0,98.4

## Keep-outs
Keep-Out Layer:
  lines w0.254: 43.5,71 43.5,81.8 72.5,81.8 72.5,81.7 72.5,71 43.5,71

## Other copper
Top Layer:
  pour cut-out: 43.833,81.467 72.167,81.467 72.167,71.333 43.833,71.333
Bottom Layer:
  pour cut-out: 43.833,81.467 72.167,81.467 72.167,71.333 43.833,71.333

## Silkscreen, mask and mechanical layers (free items; w line width, h text height)
Top Overlay:
  text "UPCNSL-ABS-PVC-DEP-1A" at 41.625,66.23 h1.52
Mechanical 3:
  lines w0.254: 44,71.4 44,81.4 72,81.4 72,71.4 44,71.4
  lines w2: -1,0 ccw(c0,0) 0,-1 ; -1,0 ccw(c0,0) 0,-1 ; -1,0 -1,98.4 ; -1,98.4 cw(c0,98.4) 0,99.4 ; -1,98.4 cw(c0,98.4) 0,99.4 ; 0,-1 82,-1 ; 0,99.4 82,99.4 ; 82,-1 ccw(c82,0) 83,0 ; 82,-1 ccw(c82,0) 83,0 ; 82,99.4 cw(c82,98.4) 83,98.4 ; 82,99.4 cw(c82,98.4) 83,98.4 ; 83,0 83,1 83,98.4